# Altium PCB DS2480B-DONGLE.PcbDoc
Units mm, origin at the board's own origin, x right, y up, seen from the top; angles counter-clockwise.
Board outline 31.11 x 34.97 mm, 2 copper layers (Top Layer, Bottom Layer); 7 components, 6 nets, 33 pads, 1 vias.
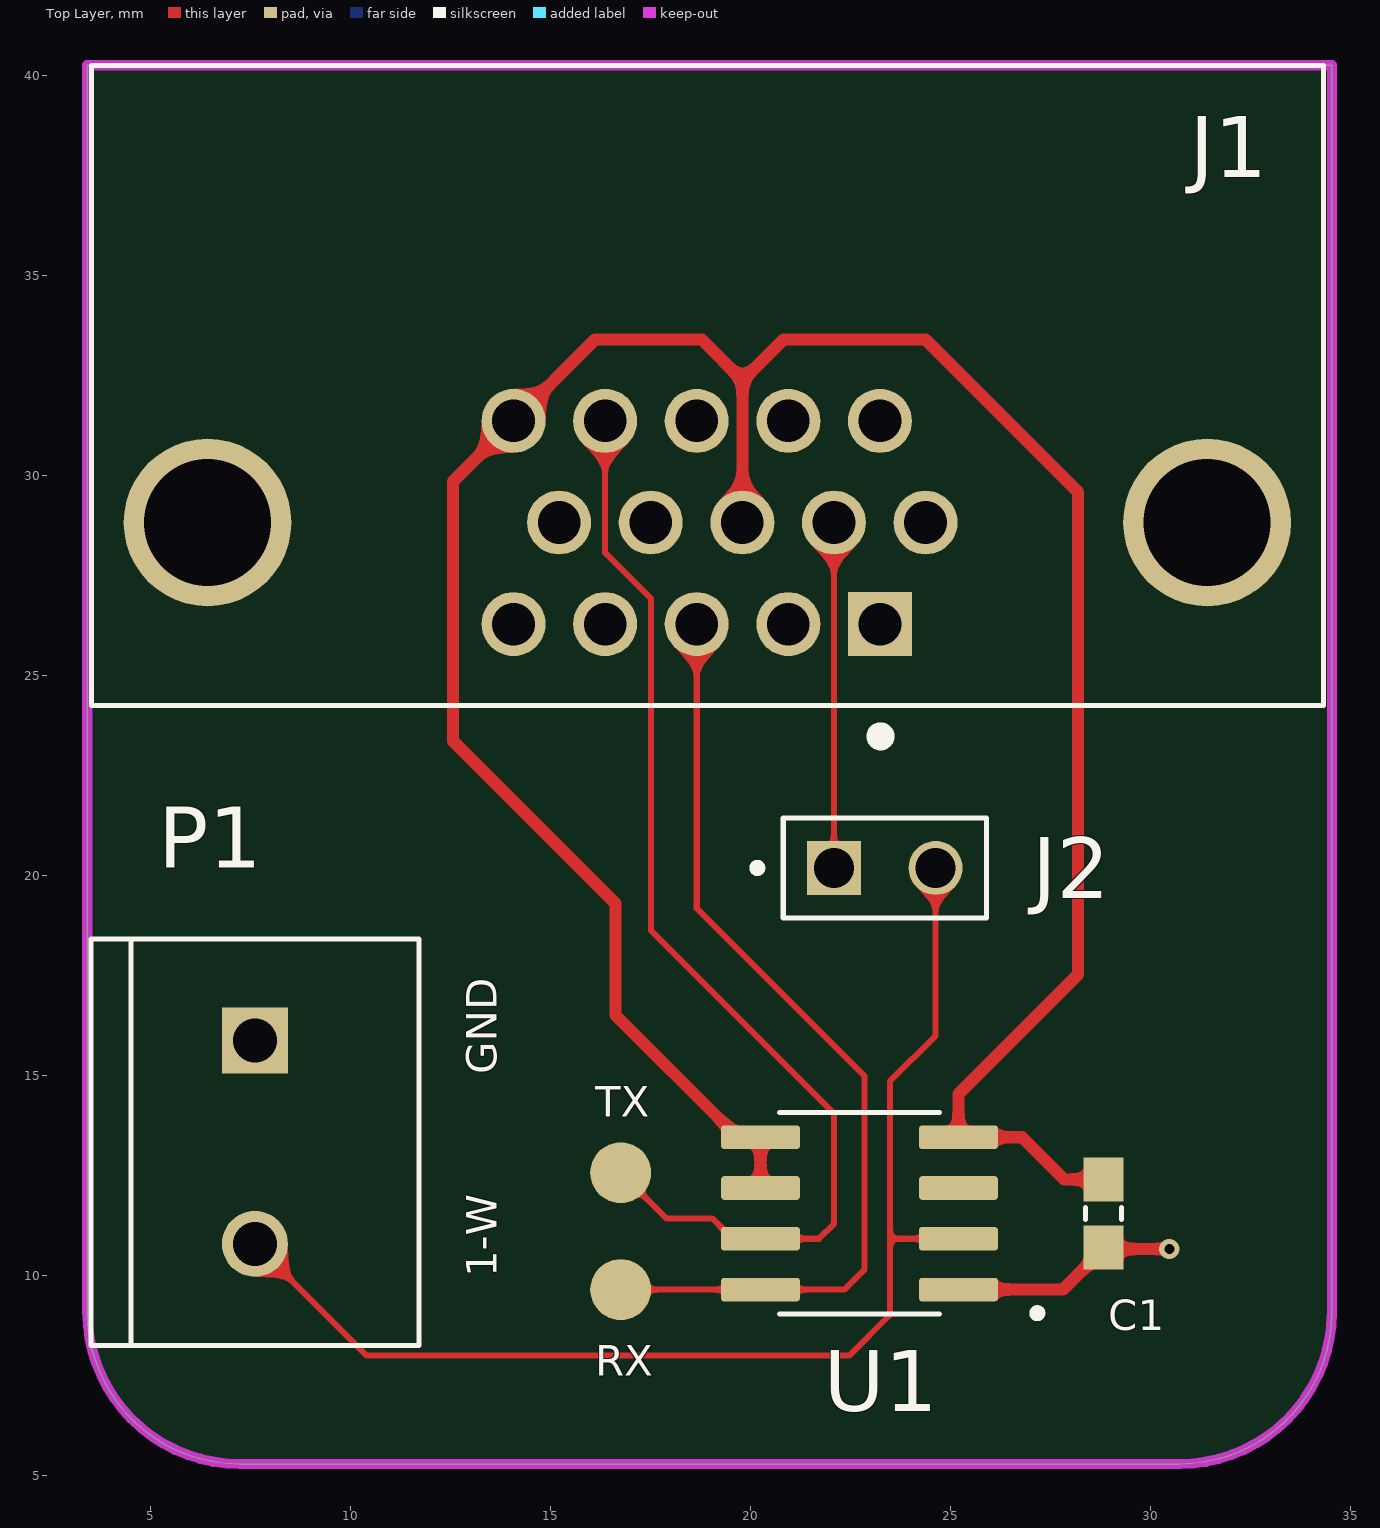
[diagram p0: Top Layer view]
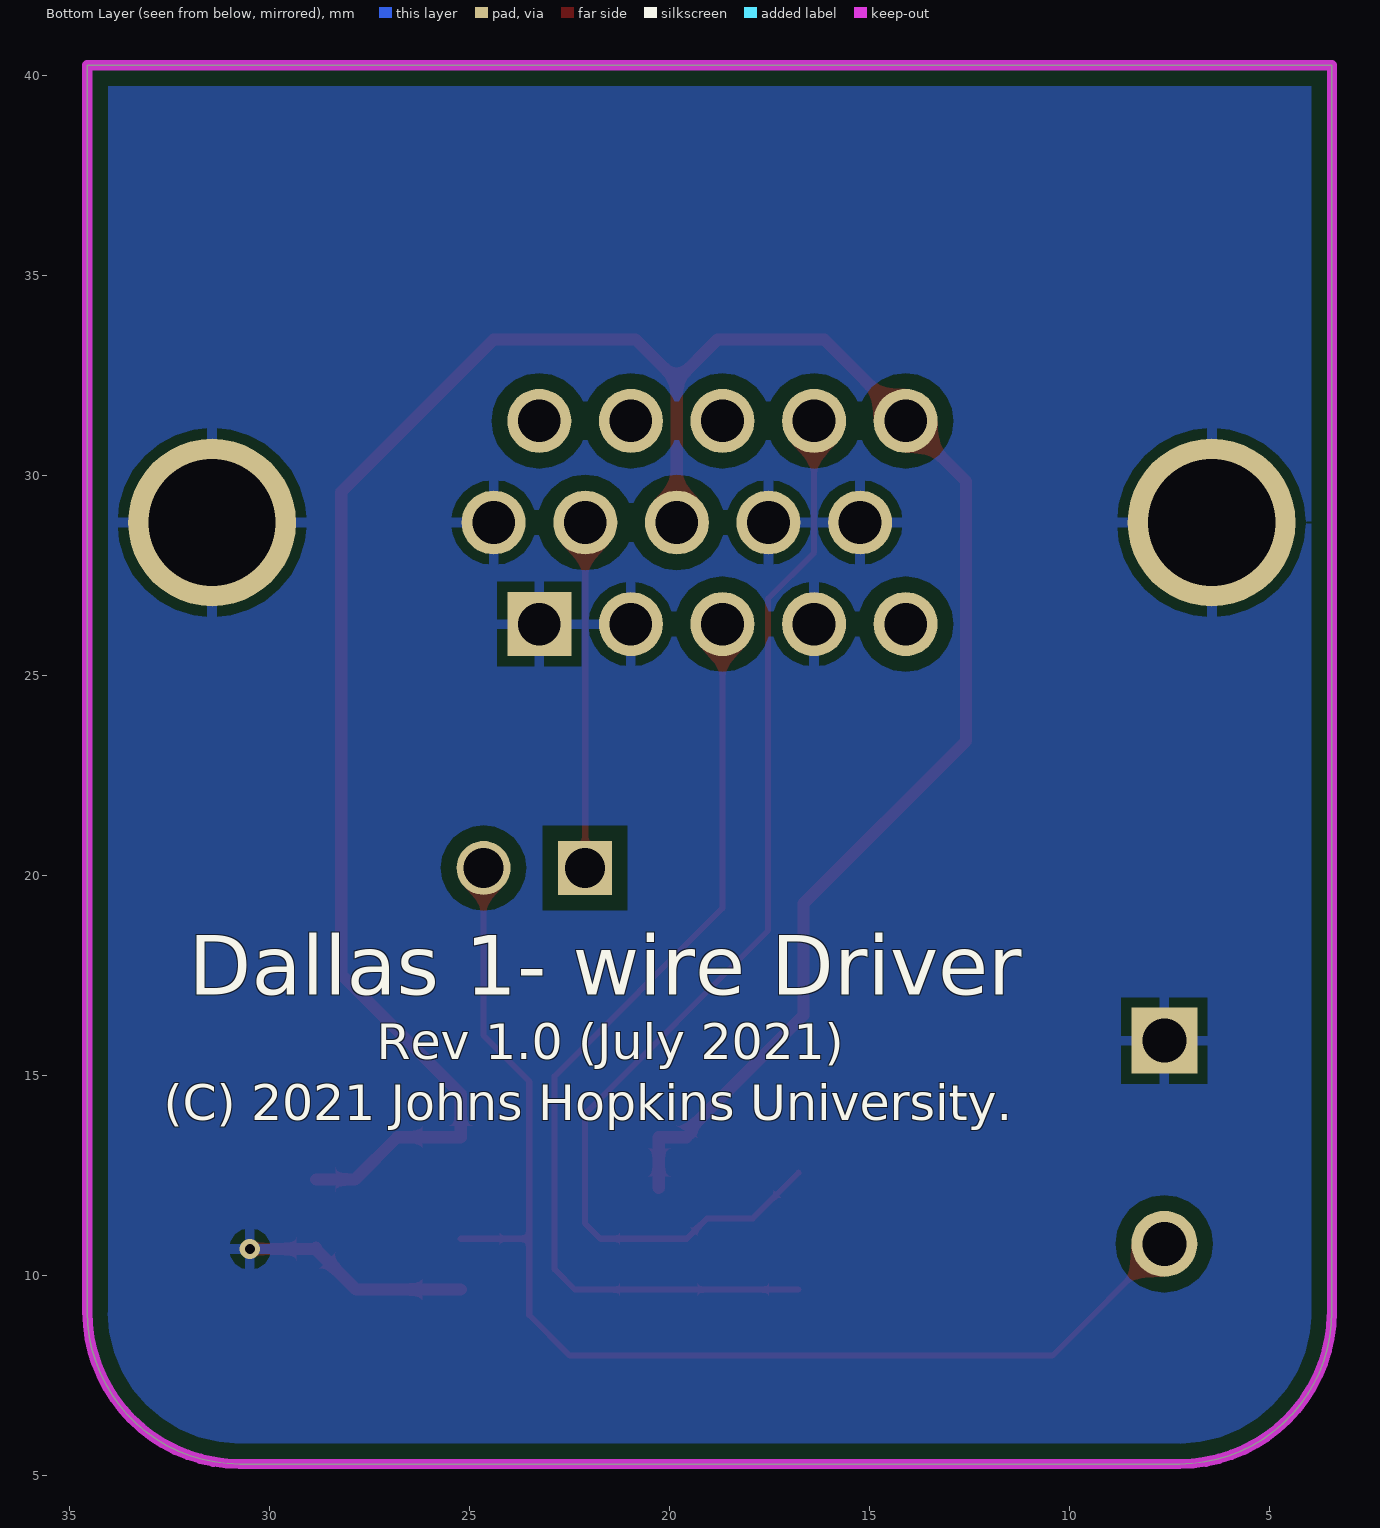
[diagram p1: Bottom Layer view, seen from below]

## Layer stack, top to bottom
Top Solder: solder mask 0.0102, Solder Resist, Dk 3.5
Top Layer: signal copper 0.0356
Dielectric 1: dielectric 0.32, FR-4, Dk 4.8
Bottom Layer: signal copper 0.0356
Bottom Solder: solder mask 0.0102, Solder Resist, Dk 3.5

## Board outline
7.239,5.291 cw(c7.239,9.101) 3.429,9.101 3.429,40.259 34.544,40.259 34.544,9.101 cw(c30.734,9.101) 30.734,5.291

## Design rules (kind name [scope] priority, off if disabled: settings)
Clearance [All] p1: gap=0.127 ignorepadtopadclearanceinfootprint=FALSE except(0.381: Arc-Fill Arc-Poly Arc-Region Track-Fill Track-Poly Track-Region THPad-Fill THPad-Poly THPad-Region; 0.508: SMDPad-Fill SMDPad-Poly SMDPad-Region Via-Fill Via-Poly Via-Region Fill-Fill Fill-Poly Fill-Region Poly-Poly Poly-Region Region-Region)
PolygonConnect [All] p1: connectstyle=Relief reliefconductorwidth=0.254 reliefentries=4 polygonreliefangle="90 Angle" airgapwidth=0.254
RoutingVias [All] p1: holewidth=0.254 width=0.508 viastyle="Through Hole" minholewidth=0.127 minwidth=0.254 maxholewidth=0.711 maxwidth=1.27
SolderMaskExpansion [All] p1: expansion=0.102 istentingtop=FALSE
Width [All] p1: maxlimit=0.381 minlimit=0.102 preferedwidth=0.152 minimp=50.000000 maximp=50.000000 favimp=50.000000
30 further rules are at their usual default settings.

## Components (designator, comment, footprint, x,y, rotation, side; value= is the part's Value field where it differs from the comment)
C1 "C0603G104K5RACT250" CAPC1608X90 28.829,11.557 r270 top
J1 "CONN DSUB 15 VERTICAL" CONN_1734530-3 18.93,28.829 r0 top
J2 "826926-2" TE_826926-2 22.098,20.193 r0 top
P1 "282837-2" TE_282837-2 7.62,13.335 r270 top
RX "" TP380X203 16.764,9.652 r0 top (schematic designator TP1)
TX "" TP380X203 16.764,12.573 r90 top (schematic designator TP2)
U1 "DS2480B" SOIC127P600X175-8N 22.733,11.557 r180 top

## Footprints (in the part's own frame and the unit in brackets; to place one, negate y for a bottom-side part, rotate by r counter-clockwise, add the part's x,y. Pads: shape width x height; smd on the part's side, far side on the other; paste and mask are expansions set on the pad)
CAPC1608X90 [mm]
  rect 1.1x1 smd: 1(-0.85,0) 2(0.85,0)
  silkscreen extent -0.15,-0.45 0.15,0.45
CONN_1734530-3 [mil]
  rect 63x63 hole 42: 1(169.88,-100)
  round 63 hole 42: 2(79.72,-100) 3(-10.43,-100) 4(-100.59,-100) 5(-190.75,-100) 6(214.76,0) 7(124.61,0) 8(34.45,0) 9(-55.71,0) 10(-145.87,0) 11(169.88,100) 12(79.72,100) 13(-10.43,100) 14(-100.59,100) 15(-190.75,100)
  round 165.2 hole 125.2: SH1(-491.93,0) SH2(491.93,0)
  silkscreen extent -606,-214 606,450
SOIC127P600X175-8N [mm]
  rrect25% 1.97x0.59 smd: 1(-2.475,1.905) 2(-2.475,0.635) 3(-2.475,-0.635) 4(-2.475,-1.905) 5(2.475,-1.905) 6(2.475,-0.635) 7(2.475,0.635) 8(2.475,1.905)
  silkscreen extent -4.54,-2.52 2,2.59
TE_282837-2 [mm]
  rect 1.65x1.65 hole 1.1: 1(-2.54,0)
  round 1.65 hole 1.1: 2(2.54,0)
  silkscreen extent -5.08,-4.1 5.08,4.1, body extent -5.68,-4.06 5.08,4.14, height 10.04
TE_826926-2 [mm]
  rect 1.35x1.35 hole 1: 1(0,0)
  round 1.35 hole 1: 2(2.54,0)
  silkscreen extent -2.02,-1.25 3.81,1.25
TP380X203 [mil]
  round 60 smd: 1(0,0)

## Part data
C1: "Multilayer Ceramic Capacitors MLCC - SMD/SMT 50V 0.1uF 0603 X7R 0.1", Package="0603 Kemet", MF=Kemet, MP=C0603G104K5RACT250, Price=None
J1: library part 1734530-3, "15 Position D-Sub, High Density Receptacle, Female Sockets Connector", Package=None, Availability=Unavailable, Centerline_Pitch="2.29 mm[.09 in]", MF="TE Connectivity", MP=1734530-3, Number_of_Positions=15, Price=None, Product_Type=Connector, SnapEDA_Link=https://www.snapeda.com/parts/1734530-3/TE%20Connectivity%20AMP%20Connectors/view-part/239021/?ref=snap, TE_purchase_URL=https://www.te.com/usa-en/product-1734530-3.html?te_bu=Cor&te_type=disp&te_campaign=seda_glo_cor-seda-global-disp-prtnr-fy19-seda-model-bom-cta_sma-317_1&elqCampaignId=32493
J2: "Pin header; pin strips; AMPMODU MOD II; male; PIN: 2; straight", Package=None, Availability=Unavailable, Centerline_Pitch="2.54 mm[.1 in]", EU_RoHS_Compliance=Compliant, MF="TE Connectivity", MP=826926-2, Number_of_Positions=2, Price=None, Product_Type=Connector
P1: "Connector Terminal Blocks Receptacle 2 Position 5.08mm Solder Straight Thru-Hole 13.5A/Contact", Package=None, Availability=Good, Check_prices=https://www.snapeda.com/parts/282837-2/TE%20Connectivity%20AMP%20Connectors/view-part/2549980/?ref=eda, MF="TE Connectivity", MP=282837-2, Price=None, Purchase-URL=https://pricing.snapeda.com/search/part/282837-2/?ref=eda, SnapEDA_Link=https://www.snapeda.com/parts/282837-2/TE%20Connectivity%20AMP%20Connectors/view-part/2549980/?ref=snap
RX TX: library part 5019, "PC Test Point, Miniature Phosphor Bronze, Silver Plating Surface Mount Mounting Type", Package="2010 Keystone", Digi-Key_Part_Number=36-5019CT-ND, Digi-Key_Purchase_URL=https://www.digikey.com/product-detail/en/keystone-electronics/5019/36-5019CT-ND/3907344?utm_source=snapeda&utm_medium=aggregator&utm_campaign=symbol, MF="Keystone Electronics", MP=5019, SnapEDA_Link=https://www.snapeda.com/parts/5019/Keystone%20Electronics/view-part/449144/?ref=snap
U1: "1/0 Driver RS232 8-SOIC", Package="SOIC-8 Maxim Integrated", MF="Maxim Integrated", MP=DS2480B

## Via types
v1: diameter 0.508, hole 0.254, Top Layer to Bottom Layer, 1 vias

## Nets (pads, with @x,y where several pads share a name; then routed paths per layer and width w, separated by ;. In a path a pad name is that pad's centre, name@x,y a point inside that pad or via, vN(x,y) a via of type N, cw(c..) or ccw(c..) an arc to the next point about the centre after c; other vN are vias at no path point)
1W: J2.2 P1.2 U1.2 | length 30.8
  Top Layer w0.152: P1.2 10.414,8.001 22.479,8.001 23.495,9.017 23.495,10.922 ; J2.2 24.638,16.002 23.495,14.859 23.495,10.922 ; U1.2 23.495,10.922
DOUTB+6: J1.14 TX.1 U1.7 | length 28.6
  Top Layer w0.152: J1.14 16.375,28.075 17.526,26.924 17.526,18.625 22.098,14.053 22.098,11.303 21.717,10.922 U1.7 19.558,10.922 19.05,11.43 17.907,11.43 TX.1
GND: C1.2 J1.1 J1.2 J1.4 J1.6 J1.9 J1.10 J1.SH1 J1.SH2 P1.1 U1.1 | length 5.8
  Top Layer w0.305: U1.1 27.824,9.652 28.829,10.657 C1.2 28.868,10.668 v1(30.48,10.668)
HOME7: J1.7 J2.1 | length 8.6
  Top Layer w0.152: J2.1 22.095,20.196 J1.7 J1.7@22.098,28.826
  Bottom Layer w0.152: J1.7 J1.7@22.098,28.826
POSLIM7: J1.3 RX.1 U1.8 | length 24.2
  Top Layer w0.152: RX.1 U1.8 22.352,9.652 22.86,10.16 22.86,14.986 18.665,19.181 J1.3
VCC-CON-B: C1.1 J1.8 J1.15 U1.4 U1.5 U1.6 | length 65.7
  Top Layer w0.305: J1.15 12.573,29.857 12.573,23.368 16.637,19.304 16.637,16.51 19.425,13.722 19.425,13.605 19.568,13.462 U1.5 U1.6 ; J1.15@14.09,31.369 16.122,33.401 18.789,33.401 19.81,32.38 ; J1.8 19.81,28.834 19.81,32.38 ; C1.1 27.852,12.407 26.797,13.462 U1.4 25.208,14.54 28.194,17.526 28.194,29.591 24.384,33.401 20.831,33.401 19.81,32.38
pads on no net: J1.5 J1.11 J1.12 J1.13 U1.3

## Polygon pours and split planes (outlines as drawn)
GND on Bottom Layer "GND_L02_P003" (solid, pour order 3): 7.239,5.291 cw(c7.239,9.101) 3.429,9.101 3.429,40.259 34.544,40.259 34.544,9.101 cw(c30.734,9.101) 30.734,5.291

## Keep-outs
Keep-Out Layer:
  the board outline again, w0.254

## Silkscreen, mask and mechanical layers (free items; w line width, h text height)
Top Overlay:
  text "GND" at 13.665,15.037 h0.76 r90
  text "1-W" at 13.665,9.957 h0.76 r90
Bottom Overlay:
  text "Dallas 1- wire Driver" at 32.004,16.541 h2.54
  text "Rev 1.0 (July 2021)" at 27.305,15.112 h1.52
  text "(C) 2021 Johns Hopkins University." at 32.639,13.588 h1.52